# Altium PCB nfc_3911_pcb20190304.PcbDoc
Units mil, origin at the board's own origin, x right, y up, seen from the top; angles counter-clockwise.
Board outline 3553.34 x 1312.13 mil, 2 copper layers (Top Layer, Bottom Layer); 77 components, 53 nets, 225 pads, 69 vias.
Unrouted connection lines stored in the file: 18.
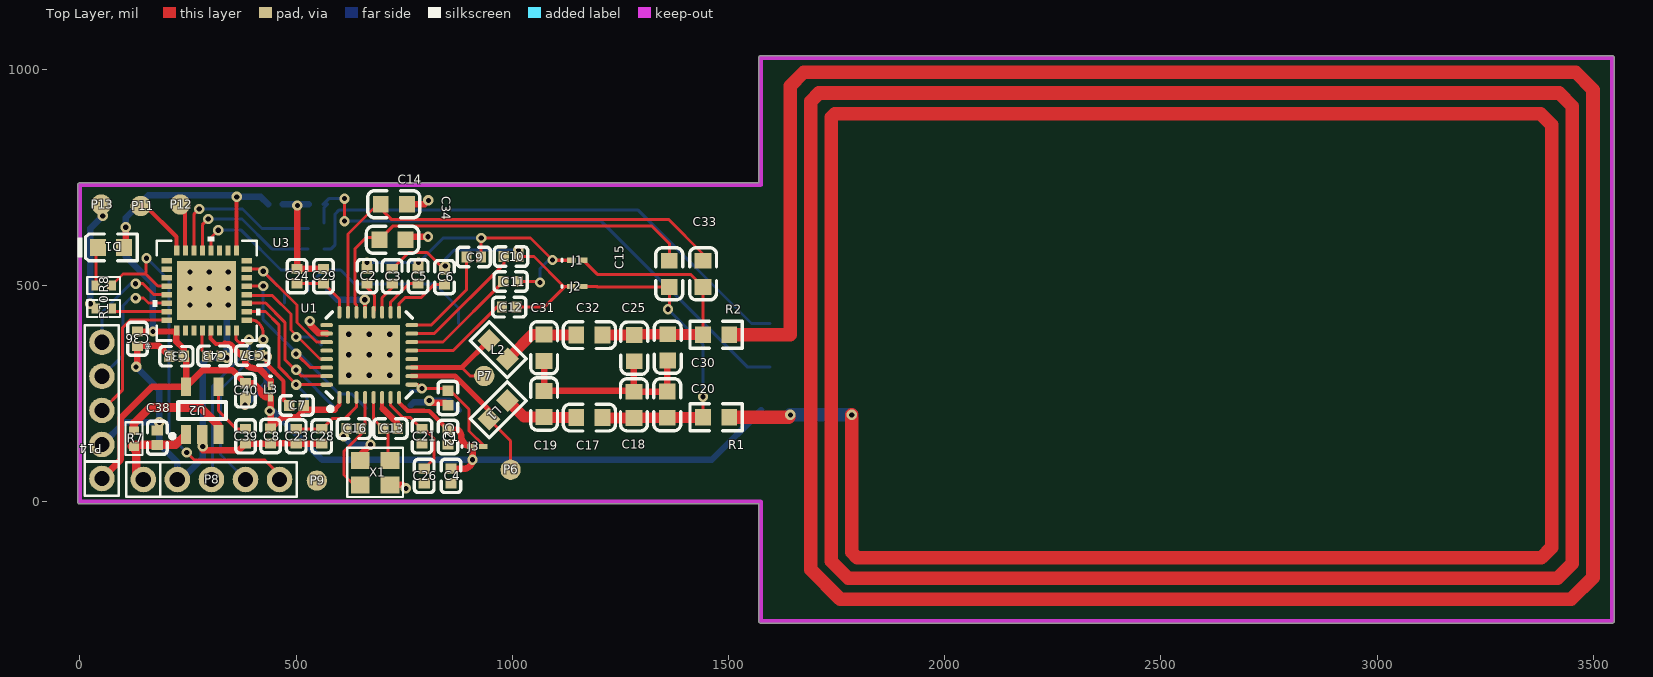
[diagram p0: Top Layer view]
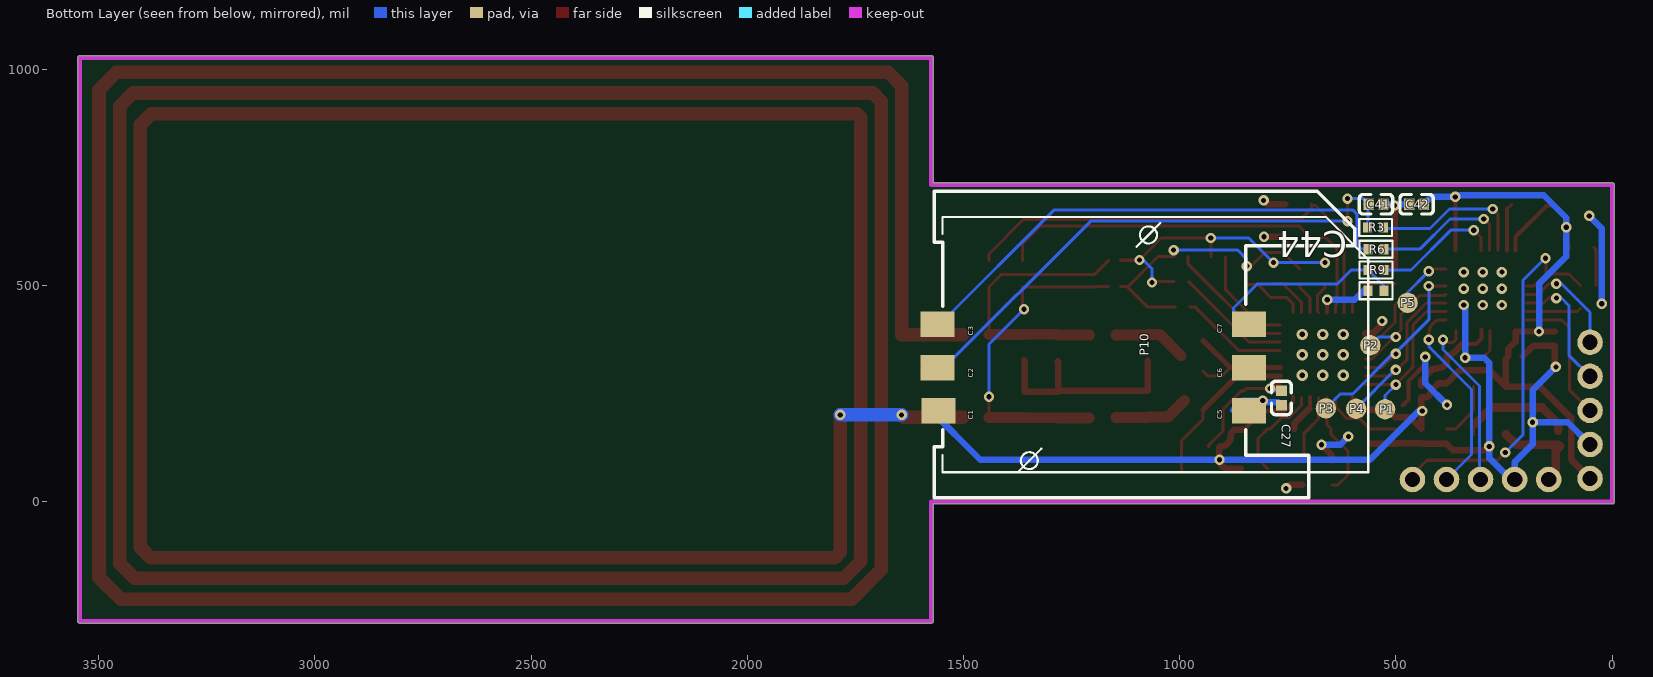
[diagram p1: Bottom Layer view, seen from below]
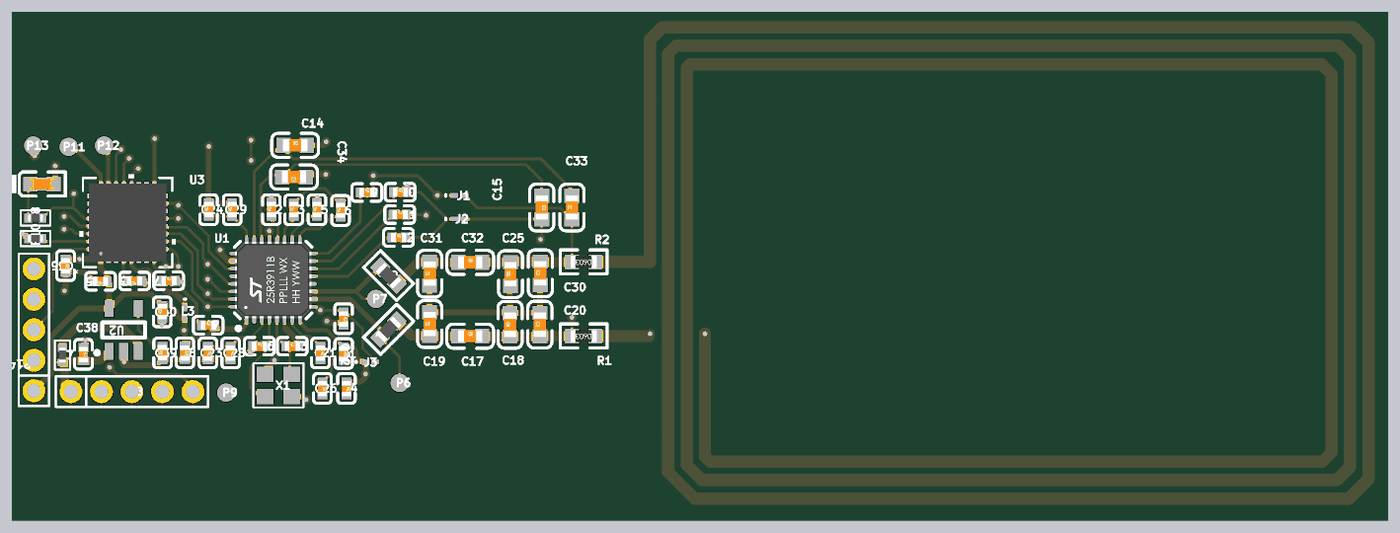
[diagram p2: 3D render of the assembled board from above, using the file's embedded part models]
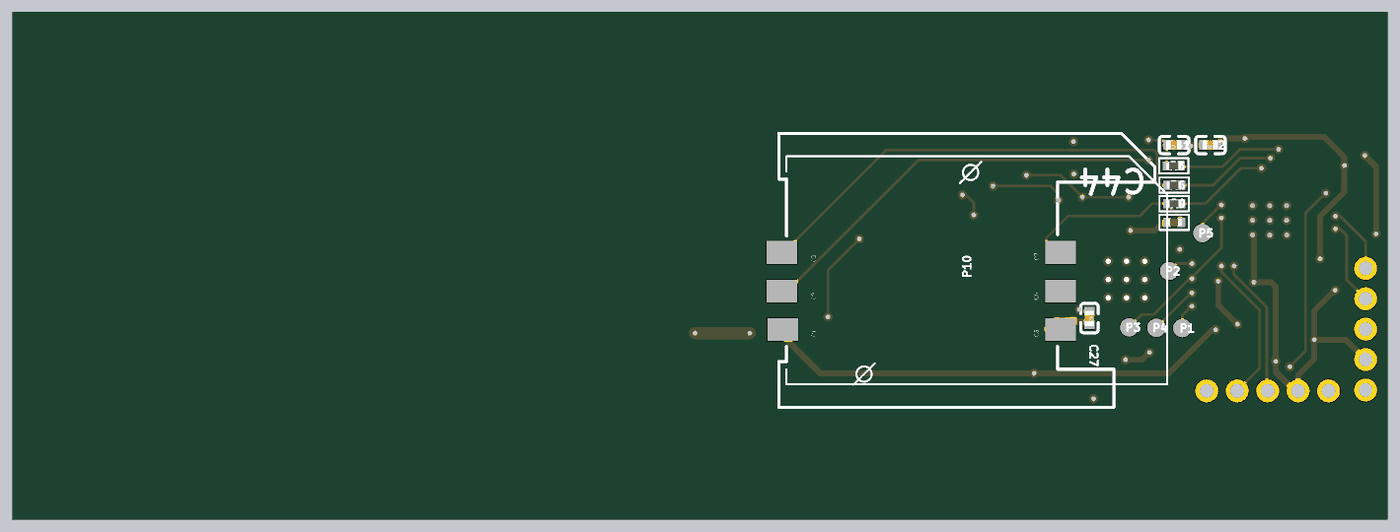
[diagram p3: 3D render of the assembled board from below, using the file's embedded part models]

## Layer stack, top to bottom
Top Solder: solder mask 0.4, Solder Resist, Dk 3.5
Top Layer: signal copper 1.4
Dielectric 1: dielectric 12.6, FR-4, Dk 4.8
Bottom Layer: signal copper 1.4
Bottom Solder: solder mask 0.4, Solder Resist, Dk 3.5

## Board outline
-5.01,0 ccw(c0,0) 0,-5.01 1569.79,-5.01 1569.79,-275.59 ccw(c1574.8,-275.59) 1575.9,-280.48 ccw(c1577,-275.59) 1577,-280.61 3543.31,-280.61 ccw(c3543.31,-275.59) 3548.32,-275.59 3548.32,1026.51 ccw(c3543.31,1026.51) 3543.31,1031.53 1574.8,1031.53 ccw(c1574.8,1026.51) 1569.79,1026.51 1569.79,737.43 0,737.43 ccw(c0,732.41) -5.01,732.41

## Design rules (kind name [scope] priority, off if disabled: settings)
Clearance Via_Polygon [isvia vs InPolygon] p1: gap=6
Clearance All_Polygon [InPolygon] p2: gap=10
Clearance All [All] p3: gap=7
PolygonConnect Via_PolygonConnect [ISVIA] p1: connectstyle=Direct reliefconductorwidth=10 reliefentries=4 polygonreliefangle="90 Angle" airgapwidth=10
PolygonConnect [All] p2: connectstyle=Relief reliefconductorwidth=18 reliefentries=4 polygonreliefangle="90 Angle" airgapwidth=10
RoutingVias [All] p1: holewidth=12 width=24 viastyle="Through Hole" minholewidth=12 minwidth=24 maxholewidth=12 maxwidth=24
SilkToSilkClearance [All] p1: silktosilkclearance=2
SilkToSolderMaskClearance [IsPad] p1: minsilkscreentomaskgap=2 clearancetoexposedcopper=TRUE
SolderMaskExpansion [All] p1: expansion=2.5
Width NFC_Width [InNetClass('NFC_Class')] p1: maxlimit=31.5 minlimit=31.5 preferedwidth=31.5
Width POWER_Width [InNetClass('POWER')] p2: maxlimit=60 minlimit=8 preferedwidth=15
Width [All] p3: maxlimit=25 minlimit=7 preferedwidth=7
28 further rules are at their usual default settings.

## Classes and differential pairs
net class POWER: AVDD GND V_RF_3911 VCC_5V
net class GND: GND
net class NFC_Class: "ANTENNA LOOP"

## Components (designator, comment, footprint, x,y, rotation, side; value= is the part's Value field where it differs from the comment)
C1 "C_1µ_0402_X5R" 0402_C 851.31,149.78 r270 top
C2 "C_5p6_0402" 0402_C 664.31,521.78 r90 top
C3 "C_5p6_0402" 0402_C 722.31,521.51 r90 top
C4 "C_100n_0402_X7R" 0402_C 858.31,59.78 r270 top
C5 "C_12p_0402" 0402_C 782.31,521.51 r90 top
C6 "C_12p_0402" 0402_C 843.31,519.51 r90 top
C7 "d.n.p." 0402_C 501,223 r0 top
C8 "C_100n_0402_X7R" 0402_C 441,152 r270 top
C9 "C_27p_0402" 0402_C 911,566 r0 top
C10 "C_27p_0402" 0402_C 997,567 r0 top
C11 "C_56p_0402" 0402_C 996,509 r0 top
C12 "C_56p_0402" 0402_C 993,450 r0 top
C13 "C_8p2_0402" 0402_C 718.31,168.96 r0 top
C14 "C_82p_0603" 0603_C 723,606 r180 top
C15 "C_10p_0603" 0603_C 1363,527.19 r270 top
C16 "C_8p2_0402" 0402_C 633.31,168.96 r0 top
C17 "C_180p_0603" 0603_C 1178.31,194.87 r0 top
C18 "d.n.p." 0603_C 1281.31,224.2 r90 top
C19 "C_680p_0603" 0603_C 1073.31,226.17 r90 top
C20 "C_120p_0603" 0603_C 1358.31,224.51 r90 top
C21 "C_10n_0402_X7R" 0402_C 791.31,151.24 r270 top
C22 "C_10n_0402_X7R" 0402_C 851,240 r270 top
C23 "C_10n_0402_X7R" 0402_C 500.31,151.24 r270 top
C24 "C_10n_0402_X7R" 0402_C 502.31,521.78 r90 top
C25 "d.n.p." 0603_C 1282.31,355.2 r90 top
C26 "C_2µ2_0402_X5R" 0402_C 796.31,59.78 r270 top
C27 "C_2µ2_0402_X5R" 0402_C 765,240 r270 bottom
C28 "C_2µ2_0402_X5R" 0402_C 559.31,151.24 r270 top
C29 "C_1µ_0402_X5R" 0402_C 563.31,521.78 r90 top
C30 "C_120p_0603" 0603_C 1359.31,357.2 r90 top
C31 "C_680p_0603" 0603_C 1073.31,356.2 r90 top
C32 "C_180p_0603" 0603_C 1178.31,385.53 r0 top
C33 "C_10p_0603" 0603_C 1441,527.19 r90 top
C34 "C_82p_0603" 0603_C 726,688 r0 top
C35 "100nF" 0402_C 223.31,336.51 r180 top
C36 "100nF" 0402_C 133,377 r270 top
C37 "100nF" 0402_C 399,338 r0 top
C38 "CAP-NP" 0402_C 179,148 r270 top
C39 "CAP-NP" 0402_C 383.31,151.24 r90 top
C40 "CAP-NP" 0402_C 382.56,257.51 r90 top
C41 "CAP-NP" 0402_C 546,688 r0 bottom
C42 "CAP-NP" 0402_C 452.27,688 r0 bottom
C43 "100nF" 0402_C 311.31,337.51 r180 top
C44 "CAP-NP" 0402C_0.4D 546,488 r180 bottom
D1 "红灯 0603" 0603_LED_S1 72,588 r0 top
J1 "closed 0R" 0603 1150.31,558.51 r0 top net-tie
J2 "closed 0R" 0603 1150.31,497.51 r0 top net-tie
J3 "open" 0603 919,128 r0 top net-tie
L1 "270n" 0603_L 967.31,212.51 r225 top
L2 "270n" 0603_L 967.31,351.51 r135 top
L3 "BEAD" 0603 441,255 r270 top
P1 "Hole" TP1 525,214 r180 bottom
P2 "Hole" TP1 559,362 r180 bottom
P3 "Hole" TP1 662,216 r180 bottom
P4 "Hole" TP1 592,215 r180 bottom
P5 "Hole" TP1 473,460 r180 bottom
P6 "Hole" TP1 996,74 r0 top
P7 "Hole" TP1 935,291 r0 top
P8 "SPI 5-M" "SIP 2.0_5_S" 146.83,51.51 r90 top
P9 "Hole" TP1 548,49 r0 top
P10 "SIM-4" SIM-MUP-C717 1199.76,310 r180 bottom
P11 "Hole" TP1 140.81,684 r0 top
P12 "Hole" TP1 232.31,687.51 r90 top
P13 "Hole" TP1 49.31,687.51 r90 top
P14 "SPI 5-M" "SIP 2.0_5_S" 51,53.78 r180 top
R1 "3R9" 0603_R 1471.31,195.18 r180 top
R2 "3R9" 0603_R 1471.31,386.53 r180 top
R3 "RES" 0402R_0.4D 547,634 r180 bottom
R6 "RES" 0402R_0.4D 546,584 r0 bottom
R7 "RES" 0402R_0.4D 125,146 r90 top
R8 "RES" 0402R_0.4D 55,500 r0 top
R9 "RES" 0402R_0.4D 546,536 r180 bottom
R10 "RES" 0402R_0.4D 55,447 r0 top
U1 "ST25R3911B" ST25R3911B 579.31,214.51 r0 top
U2 "SGM2028-3.3V" SGM2028-3.3 253.31,253.51 r210 top
U3 "STM32F031K6U6" STM32F031K6U6 293.16,488.48 r90 top
X1 "CRYSTAL-4P" 2520 593.75,33.5 r180 top

## Footprints (in the part's own frame and the unit in brackets; to place one, negate y for a bottom-side part, rotate by r counter-clockwise, add the part's x,y. Pads: shape width x height; smd on the part's side, far side on the other; paste and mask are expansions set on the pad)
0402_C [mm]
  rect 0.6x0.65 smd mask+0.051: 1(-0.425,0) 2(0.425,0)
  silkscreen extent -0.97,-0.58 0.97,0.58, body extent -0.48,-0.3 0.52,0.3, height 0.2
0402C_0.4D [mm]
  rect 0.525x0.6 smd: 1(-0.463,0) 2(0.463,0)
  silkscreen extent -0.96,-0.5 0.96,0.5, body extent -0.5,-0.25 0.5,0.25, height 0.5
0402R_0.4D [mm]
  rect 0.525x0.6 smd: 1(-0.463,0) 2(0.463,0)
  silkscreen extent -0.96,-0.5 0.96,0.5, body extent -0.5,-0.25 0.5,0.25, height 0.38
0603 [mm] "Chip Inductor, Body 0.6x0.3mm, IPC High Density"
  rect 0.5x0.3 smd: 1(-0.35,0) 2(0.35,0)
  silkscreen extent -0.9,-0.05 -0.9,0.05, body extent -0.33,-0.18 0.33,0.18, height 0.55
0603_C [mm]
  rect 0.93x0.98 smd: 1(-0.77,0) 2(0.77,0)
  silkscreen extent -1.53,-0.79 1.54,0.79, body extent -0.8,-0.4 0.8,0.4, height 0.3
0603_L [mm]
  rect 0.93x0.98 smd: 1(-0.77,0) 2(0.77,0)
  silkscreen extent -1.53,-0.79 1.54,0.79, body extent -0.82,-0.41 0.83,0.41, height 0.46
0603_LED_S1 [mm]
  rect 0.93x0.98 smd: A(0.77,0) K(-0.77,0)
  silkscreen extent -1.97,-0.79 1.54,0.79, body extent -0.8,-0.4 0.8,0.4, height 0.6
0603_R [mm]
  rect 0.93x0.98 smd: 1(-0.77,0) 2(0.77,0)
  silkscreen extent -1.53,-0.79 1.54,0.79, body extent -0.85,-0.4 0.85,0.4, height 0.56
2520 [mm]
  rect 1.1x1 smd: 1(-3.13,-1.585) 2(-1.38,-1.585) 3(-1.38,-0.135) 4(-3.13,-0.135)
  round 0.2 on Mech1: 3(-2.255,-0.86)
  rect 0.8x0.65 on Mech1: 4(-1.505,-1.435) 5(-3.005,-1.435) 6(-1.505,-0.285) 7(-3.005,-0.285)
  silkscreen extent -3.9,-2.32 -0.62,0.58
SGM2028-3.3 [mm]
  rect 0.6x1.1 smd rot 150: 1(1.412,2.051) 2(0.589,2.526) 3(-0.234,3.001) 4(-1.634,0.577) 5(0.012,-0.373)
  silkscreen extent -1.57,0.18 2.28,2.45
SIM-MUP-C717 [mm] "翻盖SIM卡座 参考MUP-C717"
  rect 2x1.5 smd: 1(-9.1,-2.54) 2(-9.15,0) 3(-9.15,2.54) 5(9.15,-2.54) 6(9.15,0) 7(9.15,2.54)
  silkscreen extent -9.35,-7.64 16.15,10.36, body extent -9.35,-7.64 15.35,10.36, height 1.9
"SIP 2.0_5_S" [mm]
  round 1.5 hole 0.9: 1(0,0) 2(0,-2) 3(0,-4) 4(0,-6) 5(0,-8)
  silkscreen extent -1,-9 1,1
ST25R3911B [mm]
  oval 0.25x0.75 smd: 1(0.534,0.682) 2(1.034,0.682) 3(1.534,0.682) 4(2.034,0.682) 5(2.534,0.682) 6(3.034,0.682) 7(3.534,0.682) 8(4.034,0.682) 17(4.034,5.682) 18(3.534,5.682) 19(3.034,5.682) 20(2.534,5.682) 21(2.034,5.682) 22(1.534,5.682) 23(1.034,5.682) 24(0.534,5.682)
  oval 0.75x0.25 smd: 9(4.784,1.432) 10(4.784,1.932) 11(4.784,2.432) 12(4.784,2.932) 13(4.784,3.432) 14(4.784,3.932) 15(4.784,4.432) 16(4.784,4.932) 25(-0.216,4.932) 26(-0.216,4.432) 27(-0.216,3.932) 28(-0.216,3.432) 29(-0.216,2.932) 30(-0.216,2.432) 31(-0.216,1.932) 32(-0.216,1.432)
  rect 3.6x3.5 smd paste-10: 33(2.284,3.182)
  silkscreen extent -0.26,-0.12 4.82,5.72, body extent -0.22,0.68 4.78,5.68, height 0.85
STM32F031K6U6 [mil]
  rect 24x12 smd paste-6: 1(-92.52,68.91) 2(-92.52,49.22) 3(-92.52,29.53) 4(-92.52,9.84) 5(-92.52,-9.84) 6(-92.52,-29.53) 7(-92.52,-49.22) 8(-92.52,-68.91) 17(92.52,-68.91) 18(92.52,-49.22) 19(92.52,-29.53) 20(92.52,-9.84) 21(92.52,9.84) 22(92.52,29.53) 23(92.52,49.22) 24(92.52,68.91)
  rect 12x24 smd paste-6: 9(-68.91,-92.52) 10(-49.22,-92.52) 11(-29.53,-92.52) 12(-9.85,-92.52) 13(9.84,-92.52) 14(29.53,-92.52) 15(49.22,-92.52) 16(68.91,-92.52) 25(68.91,92.52) 26(49.22,92.52) 27(29.53,92.52) 28(9.84,92.52) 29(-9.85,92.52) 30(-29.53,92.52) 31(-49.22,92.52) 32(-68.91,92.52)
  rect 136x136 smd paste-68: 33(0,0)
  silkscreen extent -116,-125 125,125, body extent -102,-102 102,102, height 22
TP1 [mil]
  round 47 smd: 0(0,0)

## Part data
C1 C29: library part C_1μ_0402_X5R, "1u_X5R"
C2 C3: "5p6_COG"
C4 C8: "100n_X7R"
C5 C6: "12p_COG"
C7: library part C_0402
C9 C10: "27p_COG"
C11 C12: "56p_COG"
C13 C16: "8p2_COG"
C14 C34: "82p_COG"
C15 C33: "10p_COG"
C17 C32: "180p_COG"
C18 C25: library part C_0603
C19 C31: "680p_COG"
C20 C30: "120p_COG"
C21 C22 C23 C24: "10n_x7R"
C26 C27 C28: library part C_2μ2_0402_X5R, "2u2_X5R"
C35 C36 C37: library part Cap, "Capacitor"
C38 C39: library part 1405000354, "1uF/6.3V/10%/X5R"
C40: library part 1405000727, "10nF/25V/10%/X7R"
C41 C42: library part 1405000357, "0.1uF/16V/10%/X5R"
C43: library part CAP, "Capacitor"
C44: library part 1405000181, "12pF/50V/5%/C0G"
D1: library part "0603 红灯", "发光二极管"
J1 J2: library part solder_jumper_closed, "0R"
J3: library part solder_jumper_open
L1 L2: library part L0603_270nH, "L0603_270nH"
L3: library part Inductor, "Inductor"
P8 P14: library part 1416000091, "2.00mm/1*5P/单排/直/PA=4/PC=2.8"
P10: library part 1416000310, "SIM卡座"
R1 R2: library part R0603_3R9, "3R9, 0603"
R3 R6 R9: library part 1408000466, "33R/5%/100PPM"
R7 R8: library part 1408000535, "1K/5%/100PPM"
R10: library part 1408000127, "10K/1%/100PPM"
U1: library part ST25R3911, "NFC Initiator / HF Reader IC"
U2: library part SGM2028
U3: library part MCU_LQFP32
X1: library part 1413000276, "10pF/40MHz/10PPM/60Ωmax/-40°~85°"

## Via types
v1: diameter 24, hole 12, Top Layer to Bottom Layer, tented both sides, 60 vias
v2: diameter 25.98, hole 12.99, Top Layer to Bottom Layer, tented both sides, 9 vias

## Nets (pads, with @x,y where several pads share a name; then routed paths per layer and width w, separated by ;. In a path a pad name is that pad's centre, name@x,y a point inside that pad or via, vN(x,y) a via of type N, cw(c..) or ccw(c..) an arc to the next point about the centre after c; other vN are vias at no path point)
AGD: C24.1 C29.1 U1.24 | length 143.2
  Top Layer w7: C24.1 C29.1 600.33,468.02 U1.24
"ANTENNA LOOP": R1.1 R2.1 | length 17167.9
  Top Layer w31.5: R1.1 v1@1638.82,195.18 ; R2.1 1642.53,386.53 1642.53,961.53 1674,993 3459,993 3499,953 3499,-175 3449,-225 1758,-225 1689.92,-156.92 1689.92,925.92 1709.16,945.16 3420.84,945.16 3451.26,914.74 3451.26,-142.74 3416.99,-177.01 1777.01,-177.01 1737.76,-137.76 1737.76,888.76 1746.24,897.24 3377.76,897.24 3403.27,871.73 3403.27,-105.73 3379.75,-129.25 1797.25,-129.25 1784.76,-116.76 v1(1784.76,201)
  Bottom Layer w31.5: v1(1643,201) v1(1784.76,201)
AVDD: C37.1 L3.1 U3.5 | length 218
  Top Layer w10: U3.5@302.07,396.47 302.07,377.66 314.72,365 335,365
  Top Layer w15: 335,365 335.19,364.81 345.86,364.81 365.87,344.79 ccw(c382.27,361.19) C37.1 382.27,323.6 ccw(c391.6,323.6) 385,317 ccw(c406.73,338.73) 406.73,308 414,308 441,281 L3.1
BOOT0: R10.2 U3.31 | length 129.5
  Top Layer w7: R10.2 80.44,439.77 U3.31@199.7,439.77
CLK1: R6.1 U3.21 | length 338.5
  Top Layer w7: U3.21 283.31,640.31 v1(297,654)
  Bottom Layer w7: v1(297,654) 375,654 445,584 R6.1
CLK2: P14.4 U3.30 | length 295.8
  Top Layer w7: v1(129,471) 147,471 158.54,459.46 U3.30@199.7,459.46
  Bottom Layer w7: P14.4 100,339 100,454 117,471 v1(129,471)
DATA1: R9.2 U3.20 | length 299.9
  Top Layer w7: U3.20 303,611 v1(320,628)
  Bottom Layer w7: v1(320,628) 373,628 465,536 R9.2
DATA2: P14.5 U3.29 | length 255
  Top Layer w7: v1@130,505 145,505 170.85,479.15 U3.29@199.7,479.15
  Bottom Layer w7: P14.5 51,438 117,504 v1(129,504)
GND: C1.2 C4.2 C7.1 C8.2 C13.2 C14.1 C16.1 C18.2 C19.2 C20.2 C21.2 C22.2 C23.2 C24.2 C25.1 C26.2 C27.2 C28.2 C29.2 C30.1 C31.1 C34.2 C35.2 C36.2 C37.2 C38.1 C39.1 C40.1 C41.1 C42.2 C43.1 C44.1 P8.2 P10.5 P13.0 P14.2 R10.1 U1.6 U1.12 U1.21 U1.26 U1.33 U2.2 U3.33 X1.2 X1.4@716.98,38.82 | length 3310.4
  Top Layer w10: v1(432,335) 432,318.01 471,279.01 471,236.27 C7.1 ; U1.21 v1@659.39,466.61 ; 698.76,213 U1.6
  Top Layer w15: v1(130,312) 133,315 C36.2 182.82,360.27 C35.2 ; v1(284,128) 284,119.62 368.42,119.62 C39.1 440.24,134.51 C8.2 499.55,135.27 C23.2 C28.2 ; v1(503,685) 502.31,684.31 C24.2 C29.2 ; v1(532,418) 532,410.18 552.92,389.26 570.54,389.26 U1.26 ; X1.2 648.08,108.08 v1(672,132) ; v1(659,467) v1@659.39,466.61 ; 700.88,215.13 735.04,180.97 C13.2 ; X1.4@716.98,38.82 746.18,38.82 v1(754,31) ; C14.1 760.31,613 v1(805,613) ; C34.2 797,688 v1(806,697) ; v1(808,234) 812.5,229.5 844.77,229.5 C22.2 ; C31.1 C19.2 1279.34,256.48 C18.2 ; C25.1 1281.31,323.88 C18.2 ; C30.1 1358.31,325.88 C20.2 1357.99,254.51 C18.2
  Bottom Layer w15: v1(24,458) 24,632 v1(53,661) ; P14.2 102.48,184 v1(184,184) ; v1(130,312) 184,258 v1(184,184) ; v1(343,455) 340,452 v1(340,333) 296,333 284,321 v1(284,128) 284,101 234.51,51.51 P8.2 225.57,91.43 184,133 v1(184,184) ; v1(382,224) 432,274 v1(432,335) ; C42.2 C41.1 ; C44.1@574.21,488 595.21,467 v1(659,467) ; v1(610,151) 629,132 v1(672,132) ; C27.2 772.15,230.42 804.42,230.42 v1(808,234) 853.76,234 P10.5@875.76,212
  other v1: 255,455 299,455 255,493 299,493 343,493 255,531 299,531 343,531
  other v2: 621.98,292.54 669.23,292.54 716.47,292.54 621.98,339.79 669.23,339.79 716.47,339.79 621.98,387.03 669.23,387.03 716.47,387.03
INTR_11: P5.0 U1.27 U3.15 | length 372.8
  Top Layer w7: U3.15@384.74,538.22 418.6,538.22 502,454.82 502,414.72 547.41,369.32 U1.27
  Bottom Layer w7: v1(424,533) 473,484 P5.0
MISO_11: P2.0 U1.29 U3.12 | length 337.6
  Top Layer w7: U3.12@384.74,479.15 U3.12@386.39,477.5 ; U3.12 387.81,476.5 445.5,476.5 488,434 488,397 555.06,329.95 U1.29
  Bottom Layer w7: v1(500,381) 540,381 P2.0
MOSI_11: P3.0 U1.30 U3.13 | length 524.2
  Top Layer w7: U3.13@384.74,498.84 385.9,500 386.9,499 v1(424,499) ; v1@503,340 532.74,310.26 U1.30
  Bottom Layer w7: v1(424,499) 424,421 v1@503,342 ; v1(500,342) v1@503,342 ; P3.0 629,249 600,249 507,342 v1@503,342
NetC2_2: C2.2 C5.2 C9.2 C11.2 J1.1 | length 682.7
  Top Layer w7: C9.2 927.73,609.73 1042.27,609.73 v1(1093,559) 1093.49,558.51 J1.1 ; C11.2 1062,509 v1(1064,507)
  Bottom Layer w7: v1(664,553) v1(783,553) 840,610 v1(928,610) ; v1(1064,507) 1064,539 1084,559 v1(1093,559)
NetC3_2: C3.2 C6.2 C10.2 C12.2 J2.1 | length 630.3
  Top Layer w7: C3.2 760.27,576.21 775.97,576.21 776.26,576.5 803.05,576.5 C6.2 ; C12.2 1074,450 1121.51,497.51 ; C10.2 1050,567 1119.49,497.51 1121.51,497.51 ; J2.1 1121.51,497.51
  Bottom Layer w7: v1(845,545) 845,561 866,582 v1(1014,582)
NetC13_1: C13.1 U1.5 X1.1 | length 144.1
  Top Layer w7: U1.5 679.07,191.46 C13.1 712,158.54 X1.1@712,110.93
NetC16_2: C16.2 U1.4 X1.3@648.08,38.82 | length 246.1
  Top Layer w7: X1.3@648.08,38.82 634.18,38.82 611,62 611,117 650.04,156.04 C16.2 659.39,178.31 U1.4
NetC17_1: C17.1 C19.1 L1.1 | length 175.4
  Top Layer w7: C19.1 C19.1@1074.29,194.87
  Top Layer w25: L1.1 1026.84,195.85 C19.1 ; C19.1@1074.29,194.87 C17.1
NetC31_2: C31.2 C32.1 L2.1 | length 171.9
  Top Layer w7: C31.2 C31.2@1074.29,385.53
  Top Layer w25: L2.1@996.74,337.74 1045.51,386.51 C31.2 ; C31.2@1074.29,385.53 C32.1
NetC39_2: C39.2 U2.4 | length 136
  Top Layer w7: U2.4 320.36,210.64 363.02,167.98 C39.2
NetC41_2: C41.2 P10.2 R3.1 | length 1277.5
  Top Layer w7: v1(612,649) v1(612,701)
  Bottom Layer w7: C41.2 575.73,701 v1(612,701) ; R3.1@565,644.21 565,680.27 C41.2@572.73,688 ; v1(612,649) 1206,649 1543,312 P10.2@1596.24,312
NetC44_2: C44.2 P10.7 R9.1 | length 437.2
  Bottom Layer w7: C44.2 527.79,499.01 564.21,535.42 R9.1 ; R9.1@574.21,536 603.18,536 635.18,504 820,504 875.76,448.24 P10.7@875.76,412
NetD1_K: D1.K R8.1 | length 90
  Top Layer w7: R8.1 36.79,583.11 D1.K
NetP10_3: P10.3 R6.2 | length 1220.7
  Bottom Layer w7: R6.2 580,584 589.5,593.5 589.5,664.5 600,675 796.18,675 796.68,674.5 815.32,674.5 815.82,675 1290,675 1553,412 P10.3@1596.24,412
NetR7_2: R7.2 U2.3 | length 265.5
  Top Layer w7: U2.3 U2.3@320.36,176.64
  Top Layer w20: R7.2 125,181 162,218 279,218 U2.3@320.36,176.64
NRST: C43.2 U3.4 | length 64
  Top Layer w7: U3.4@282.38,396.47 282.38,349.71 C43.2
RFI1: C14.2 C15.1 U1.22 | length 958.4
  Top Layer w7: U1.22 639.7,454.48 636.5,457.68 636.5,585.5 662,611 C14.2@695.69,611 ; C14.2 724.69,638 1322,638 1363,597 C15.1
RFI2: C33.2 C34.1 U1.23 | length 1097.6
  Top Layer w7: U1.23 620.02,619.2 685.82,685 C34.1@694.69,685 ; C34.1 695.69,677.31 720,653 1361,653 1441,573 C33.2
RFO1: L1.2 P6.0 U1.10 | length 369.6
  Top Layer w7: L1.2@945.87,212.13 L1.2 996,140.95 P6.0
  Top Layer w12: U1.10 867.43,290.57 L1.2@945.87,212.13
RFO2: L2.2 P7.0 U1.11 | length 279.4
  Top Layer w7: 883.18,310.26 902.44,291 P7.0 P7.0@945.87,301.87
  Top Layer w12: U1.11 883.18,310.26 L2.2
RST1: R3.2 U3.22 | length 372.6
  Top Layer w7: U3.22 263.62,664.62 v1(276,677)
  Bottom Layer w7: v1(276,677) 376,677 421,632 R3.2@528.79,632
RST2: P14.3 U3.32 | length 319.5
  Top Layer w7: P14.3 99,259.26 99,403.15 115.92,420.08 U3.32@199.7,420.08
RXD: P8.4 U3.9 | length 460.4
  Top Layer w7: U3.9@384.74,420.08 396.91,420.08 cw(c396.91,395.91) 414,413 cw(c389.86,388.86) 424,388.86 v1(424,375)
  Bottom Layer w7: P8.4 325,109.56 325,259.82 424,358.82 v1(424,375)
SCLK_11: P4.0 U1.31 U3.11 | length 435.7
  Top Layer w7: U3.11@384.74,459.46 429.54,459.46 474,414.99 474,329 512.43,290.57 U1.31
  Bottom Layer w7: v1(500,305) 502,305 P4.0
SEN_11: P1.0 U1.32 U3.10 | length 380.2
  Top Layer w7: U3.10@384.74,439.77 429.43,439.77 460,409.2 460,312 501.11,270.89 U1.32
  Bottom Layer w7: v1(500,270.89) 525,245.89 P1.0
STATE: P8.5 R8.2 U3.28 | length 911.4
  Top Layer w7: R8.2 99.71,526.5 152.5,526.5 ; v1@152.5,552.5 152.5,526.5 ; U3.28@199.7,498.84 180.16,498.84 152.5,526.5 ; v1(247,114) 265,96 428,96 461.79,62.21 P8.5
  Bottom Layer w7: v1(154,563) 155,563 206.5,511.5 206.5,154.5 v1(247,114) v1@248,113
SWDCLK: P11.0 U3.24 | length 143.2
  Top Layer w7: P11.0 P11.0@152,684
  Top Layer w10: P11.0@152,684 223.31,612.69 U3.24@223.31,581.51
SWDIO: P12.0 U3.23 | length 110.4
  Top Layer w7: P12.0 P12.0@243,676.82
  Top Layer w10: U3.23@243,581.51 P12.0@243,676.82
TRIM1: C15.2 C17.2 C18.1 C20.1 J2.2 R1.2 | length 770
  Top Layer w7: J2.2 1196.51,497.51 1196,497 1362.87,497 C15.2 1363,448 v1(1360,445) ; C17.2 C17.2@1209.61,193.88 ; C18.1 C18.1@1281.62,194.2 ; C20.1 C20.1@1359.29,195.18 ; R1.2 v1(1441,243)
  Top Layer w25: C17.2@1209.61,193.88 C18.1 ; C18.1@1281.62,194.2 C20.1 ; C20.1@1359.29,195.18 R1.2
  Bottom Layer w7: v1(1360,445) 1441,364 v1(1441,243)
TRIM1_0: C3.1 U1.19 | length 76.3
  Top Layer w7: U1.19 698.76,471.76 722.31,495.31 C3.1
TRIM1_1: C6.1 U1.17 | length 143.6
  Top Layer w7: U1.17 738.13,458.13 752,472 789,472 819.78,502.78 C6.1
TRIM1_2: C10.1 U1.15 | length 296.6
  Top Layer w7: U1.15 819.81,389 980.27,549.46 C10.1
TRIM1_3: C12.1 U1.13 | length 250.2
  Top Layer w7: U1.13 863.63,349.63 964,450 C12.1
TRIM2: C25.2 C30.2 C32.2 C33.1 J1.2 R2.2 | length 646.4
  Top Layer w7: J1.2 1196.6,526 1411.87,526 C33.1 R2.2 ; C25.2 C25.2@1284.31,387.51 ; C30.2 C30.2@1360.29,386.53
  Top Layer w25: C32.2 C25.2 ; C25.2@1284.31,387.51 C30.2 ; C30.2@1360.29,386.53 R2.2
TRIM2_0: C2.1 U1.20 | length 75
  Top Layer w7: C2.1 664.31,494.69 681.5,477.5 681.5,440.64 U1.20
TRIM2_1: C5.1 U1.18 | length 105.1
  Top Layer w7: U1.18 718.44,461.46 761.76,504.78 C5.1
TRIM2_2: C9.1 U1.16 | length 236.1
  Top Layer w7: U1.16 812.69,408.69 894.27,490.27 C9.1
TRIM2_3: C11.1 U1.14 | length 269.5
  Top Layer w7: U1.14 839.58,369.32 C11.1
TXD: P8.3 U3.8 | length 414.8
  Top Layer w7: U3.8@361.14,396.47 361.14,379 ccw(c373.54,379) 362.25,373.87 365.37,370.74 ccw(c372,377.37) 372,368 374.1,368 ccw(c374.1,391.9) v1(391,375)
  Bottom Layer w7: P8.3 306.5,53.7 306.5,267.5 391,352 v1(391,375)
V_RF_3911: C1.1 C4.1 C7.2 C8.1 C35.1 C36.1 C40.2 C42.1 D1.A J3.1 L3.2 P10.1 P14.1 U1.1 U1.8 U2.5 U3.1 U3.17 | length 3446.6
  Top Layer w10: U3.17 v1@362.07,697 ; 589.33,212.79 600.33,224.68 U1.1 ; U1.8 738.13,229.87 757.5,210.5 796.56,210.5 797.06,210 807.82,210 C1.1
  Top Layer w15: P14.1@56.78,53.78 P14.1 95.03,97.81 95.03,194.03 167.01,266.01 U2.5 ; D1.A 106,591.68 v1(106,635) ; C36.1 v1(169,393.73) 223.43,393.73 223.43,370.18 240.04,353.57 C35.1 245.56,330.99 U2.5 ; L3.2@441,237.22 C8.1 467.97,195.7 502.08,195.7 519.17,212.79 589.33,212.79 ; L3.2 434.78,241.22 cw(c434.78,258) 418,258 401.76,274.24 C40.2 352.8,304 283.54,304 U2.5 ; C1.1 871.52,166.51 cw(c871.52,159.34) 876.59,164.41 cw(c863.31,151.13) 882.09,151.13 ccw(c905.22,151.13) J3.1 cw(c905.22,125.22) 908,125.22 v1(908,97) cw(c887.51,97) 887.51,76.51 C4.1
  Bottom Layer w15: v1(169,393.73) 169,504 106,567 v1(106,635) 106,657 158,709 359,709 v1(363,705) 418.54,705 C42.1 ; v1(439,210) 447,210 560,97 v1(908,97) 1461,97 P10.1@1576,212
VCC_5V: C38.2 P8.1 R7.1 U2.1 | length 224.3
  Top Layer w15: R7.1@120.31,128.09 R7.1@123.78,131.57
  Top Layer w20: R7.1@120.31,128.09 130.2,118.2 130.2,68.14 P8.1 ; R7.1@123.78,131.57 179,131.57 221.35,131.57 U2.1
VSP_A: C21.1 C26.1 U1.7 | length 229.9
  Top Layer w7: U1.7 718.44,223.02 746.46,195 764.28,195 C21.1 797.3,167.98 819,146.27 819,99.2 C26.1
VSP_D: C23.1 C28.1 U1.3 | length 182.5
  Top Layer w7: C23.1 C28.1 583.59,192.26 612.26,192.26 639.7,219.7 U1.3
VSP_RF: C22.1 C27.1 J3.2 U1.9 | length 278.9
  Top Layer w7: U1.9 782.11,270.89 v1(791,262) 843.73,262 844.73,263 C22.1 856.99,256.73 900,213.72 900,163.82 932.78,131.04 J3.2
  Bottom Layer w7: C27.1 v1@787.73,256.73
pads on no net: P9.0 P10.6 U1.2 U1.25 U1.28 U3.2 U3.3 U3.6 U3.7 U3.14 U3.16 U3.18 U3.19 U3.25 U3.26 U3.27 X1.3@682.53,67.36 X1.4@653,90 X1.5 X1.6 X1.7

## Keep-outs
Keep-Out Layer:
  lines w10: 1574.8,-275.59 1574.8,0 0,0 0,732.41 1574.8,732.41 1574.8,1026.51 3543.31,1026.51 3543.31,-275.59 1577,-275.59

## Dimensions
3543.31,-275.59 to 3543.31,1026.51 on Keep-Out Layer
1577,-275.59 to 3543.31,-275.59 on Keep-Out Layer
0,732.41 to 1574.8,732.41 on Keep-Out Layer
0,732.41 to 0,0 on Keep-Out Layer

## Text inside footprints (layer, text, board x,y; h text height)
P10: Mechanical 1 "LOCK" at 1317.87,102.91 h20; Mechanical 1 "OPEN" at 1057.24,632.05 h20 r180; Bottom Overlay "C1" at 1472.99,189.92 h20 r270; Bottom Overlay "C5" at 897.01,191.1 h20 r270; Bottom Overlay "C2" at 1472.91,286.97 h20 r270; Bottom Overlay "C6" at 897.01,286.38 h20 r270; Bottom Overlay "C3" at 1472.91,384.02 h20 r270; Bottom Overlay "C7" at 897.01,389.92 h20 r270
U3: Top Overlay "*" at 174.74,351.35 h20 r90; Mechanical 13 "*" at 214.39,417.96 h20 r90